# Altium PCB IPMC_MACP - 完成2.PcbDoc (part 2 of 2)
Units mil, origin at the board's own origin, x right, y up, seen from the top; angles counter-clockwise.
Board outline 3909.92 x 3909.91 mil, 2 copper layers (Top Layer, Bottom Layer); 132 components, 84 nets, 496 pads, 244 vias.
Unrouted connection lines stored in the file: 140.
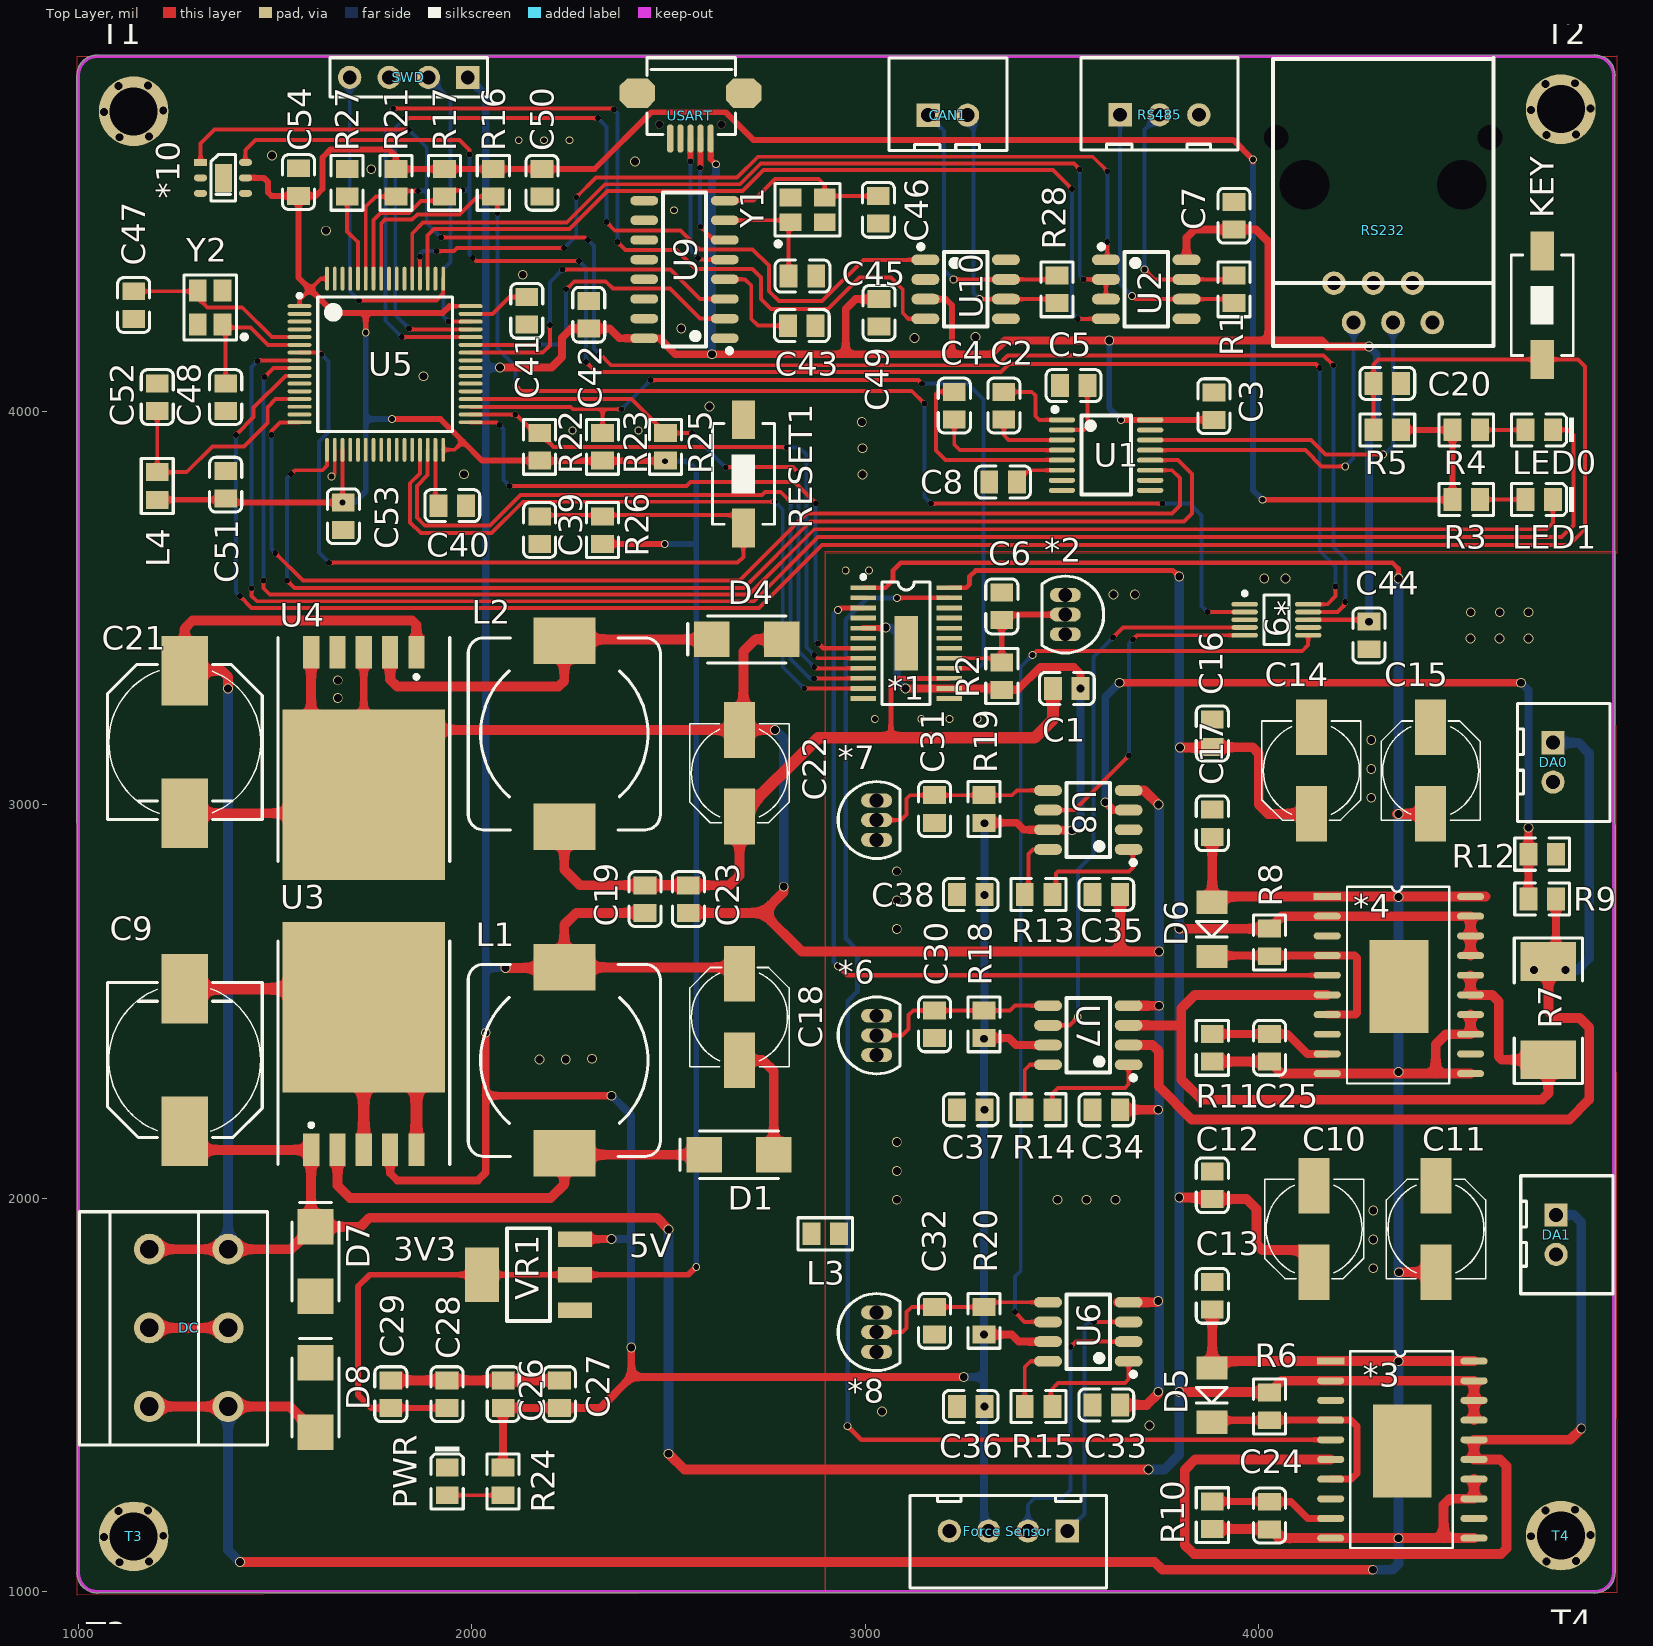
[diagram p0: Top Layer view]

## Via types
v1: diameter 25, hole 20, Top Layer to Bottom Layer, 100 vias
v2: diameter 15, hole 15, Top Layer to Bottom Layer, 85 vias
v3: diameter 20, hole 15, Top Layer to Bottom Layer, 35 vias
v4: diameter 20, hole 20, Top Layer to Bottom Layer, 24 vias

## Nets (pads, with @x,y where several pads share a name; then routed paths per layer and width w, separated by ;. In a path a pad name is that pad's centre, name@x,y a point inside that pad or via, vN(x,y) a via of type N, cw(c..) or ccw(c..) an arc to the next point about the centre after c; other vN are vias at no path point) (continued)
pads on no net: *1.2 *1.4 *1.6 *1.12 *1.13 *1.22 *1.25 *2.3 *3. *3.3 *3.8 *3.12 *4. *4.3 *4.8 *4.12 *6.3 *7.3 *8.3 *10.3 *10.4 RS232.1 RS232.2 RS232.6 RS232.7 RS232.8 RS232.9 RS232.10 T1.1 T2.1 T3.1 T4.1 U1.7 U1.8 U1.9 U1.10 U5.2 U5.3 U5.4 U5.11 U5.14 U5.15 U5.20 U5.21 U5.22 U5.23 U5.24 U5.25 U5.26 U5.27 U5.28 U5.37 U5.38 U5.39 U5.40 U5.41 U5.50 U5.54 U5.55 U5.56 U5.61 U5.62 U9.9 U9.10 U9.11 U9.12 U9.13 U9.14 U9.15 U10.5 USART. USART.4 USART.6 USART.7 Y1.2 Y1.4 Y2.2 Y2.4
copper on no net:
  other v4: 1103.77,1074.09 1178.96,1075.66 4731.48,1075.82 4806.68,1077.4 1064.8,1138.43 4692.52,1140.16 1215.2,1141.57 4842.91,1143.31 1101.04,1204.34 1176.23,1205.91 4728.75,1206.07 4803.95,1207.64 1103.77,4696.61 1178.96,4698.18 4731.48,4701.81 4806.68,4703.38 1064.8,4760.94 1215.2,4764.09 4692.52,4766.14 4842.91,4769.29 1101.04,4826.85 1176.23,4828.43 4728.75,4832.05 4803.95,4833.63

## Polygon pours and split planes (outlines as drawn)
SGND on Top Layer "Top Layer-No Net" (solid, remove dead copper, pour order 20): 4910,996 4909,997 2898,997 2898,3642 2897,3643 2898,3644 4906,3644
GND on Top Layer "Top Layer-No Net" (solid, remove dead copper, pour order 16): 995,991 996,992 996,4903 4911,4903 4910,4902 4910,3639 2898,3639 2898,3582 2898,997
SGND on Bottom Layer "Top Layer-No Net" (solid, remove dead copper, pour order 22): 4910,996 4909,997 2898,997 2898,3641.73 4905.75,3644
GND on Bottom Layer "Top Layer-No Net" (solid, remove dead copper, pour order 18): 995,991 996,992 996,4903 4911,4903 4910,4902 4910,3639 2898,3639 2898,3582 2898,997

## Keep-outs
Keep-Out Layer:
  lines w7.99: 999.84,1047.64 ccw(c1047.64,1047.64) 1047.64,999.84 ; 999.84,4853.94 cw(c1047.64,4853.94) 1047.64,4901.73 4854.72,4901.57 ; 4853.94,999.84 ccw(c4853.94,1047.64) 4901.73,1047.64 ; 4853.94,4901.73 cw(c4853.94,4853.94) 4901.73,4853.94
  lines w8: 999.84,4853.94 1000,1045.67 ; 1042.13,1000 4853.94,1000 ; 4901.57,4857.09 4901.73,1047.64

## Silkscreen, mask and mechanical layers (free items; w line width, h text height)
Top Overlay:
  text "5V" at 2400,1850 h60
  text "3V3" at 1800,1840 h60
Bottom Overlay:
  text "IO" at 1867.45,4684.15 h60 r270
  text "5V" at 1964.57,4674.15 h60 r270
  text "H" at 3189.98,4672.23 h60 r90
  text "L" at 3237.22,4632.24 h60 r270
  text "B" at 3720.47,4629.92 h60 r270
  text "A" at 3622.05,4625.98 h60 r270
  text "CLK" at 1665.35,4614.17 h60 r270
  text "GND" at 1766.4,4614.17 h60 r270
  text "GND" at 3818.9,4511.81 h60 r270
  text "GND" at 4232.28,4401.57 h60 r270
  text "RX" at 4181.1,4055.12 h60 r270
  text "TX" at 4283.46,4055.12 h60 r270
  text "IPMC Platform" at 1196.85,2826.77 h60 r90
  text "IBSS 180228" at 1311.02,2822.83 h60 r90
  text "+12V" at 1683.84,1838.58 h60
  text "GND" at 1633.86,1641.73 h60
  text "-12V" at 1683.84,1448.82 h60
Mechanical 1:
  lines w8: 2897.64,580 2897.64,3641.73 5200,3641.73